# EAGLE board PropGame_DevBoard_schema (EAGLE 6.3)
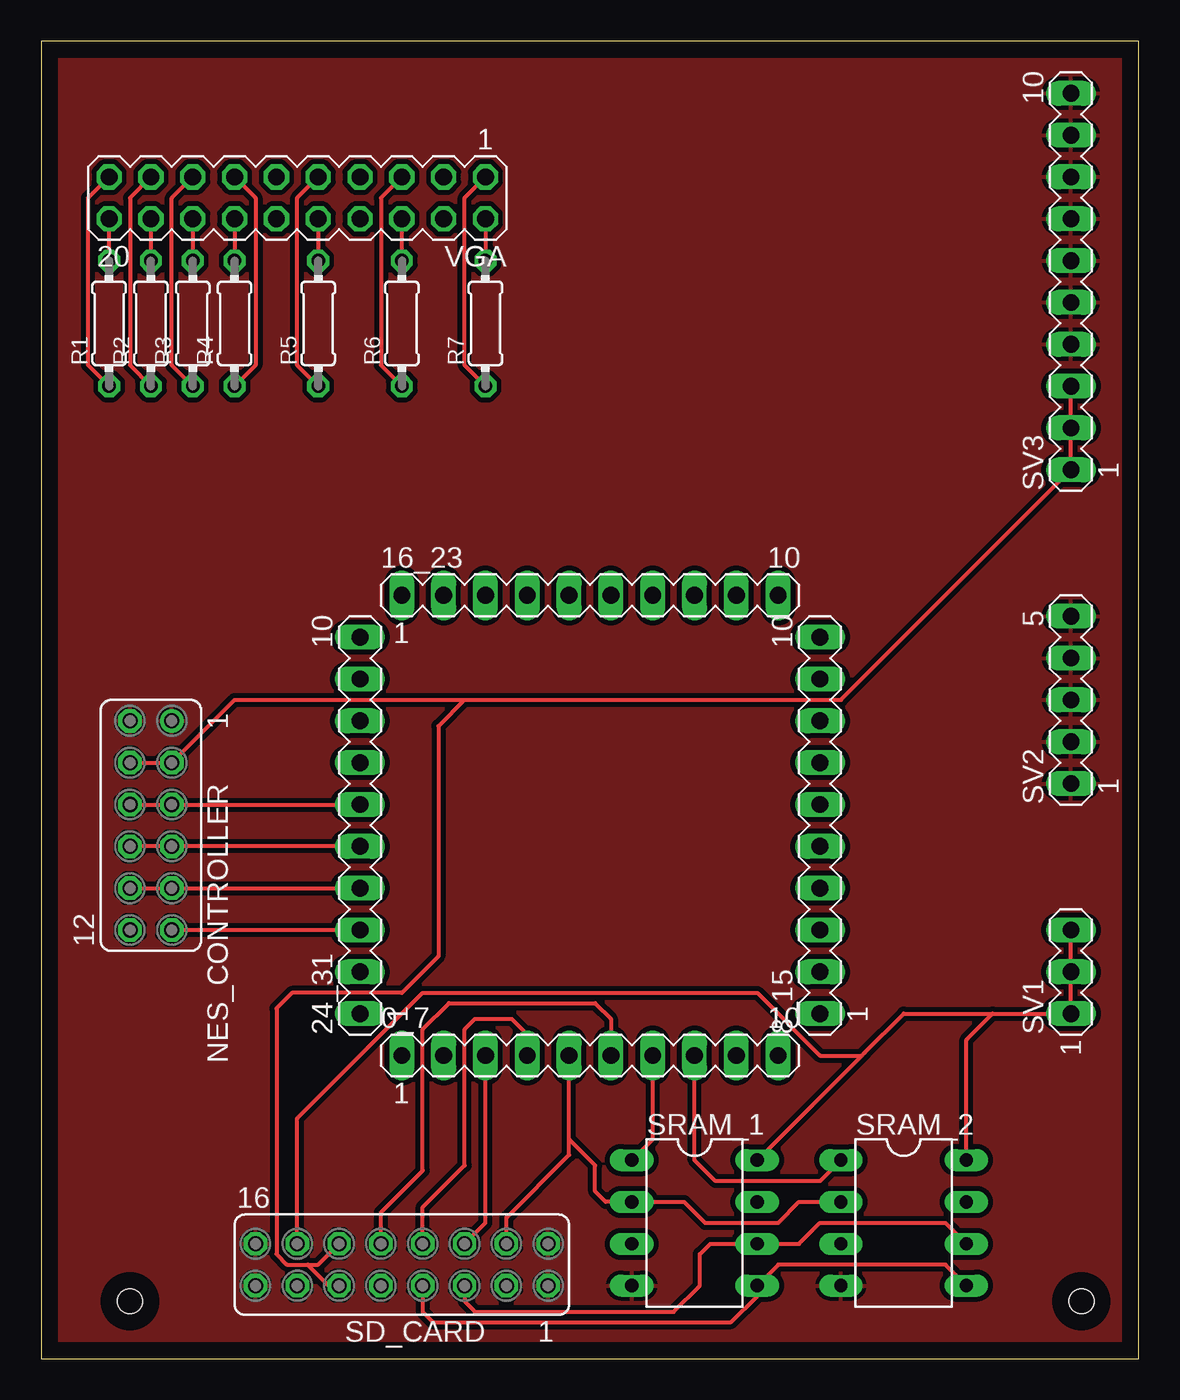
[diagram p0: board, top side]
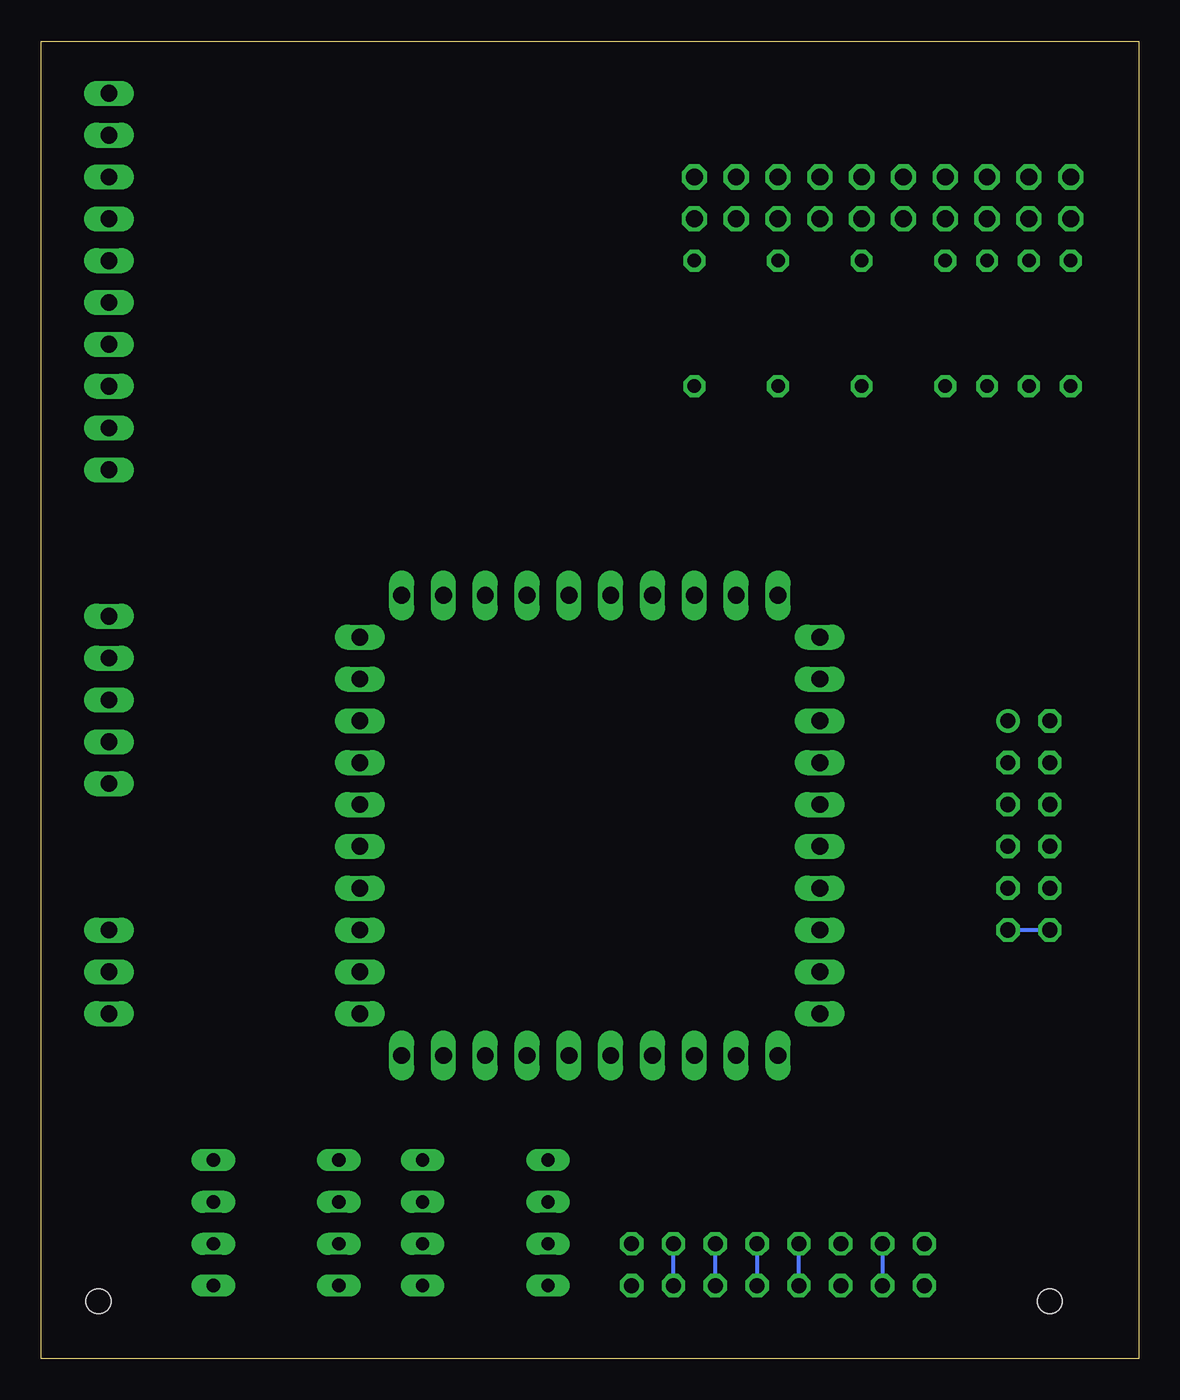
[diagram p1: board, bottom side, seen from below]

Size 66.66 x 80 mm. Coordinates in mm from the lower left corner, seen from the top.
Outline: 0,0 66.66,0 66.66,80 0,80 0,0
Copper layers (1*16): Top 0.035mm / dielectric 1.5mm / Bottom 0.035mm
Design rules "default *": minimum track width 10mil, minimum drill 24mil, track to track 12mil, track to pad 12mil, pad to pad 12mil, via to via 12mil, smd to smd 12mil, copper to edge 40mil, drill to drill 8mil, minimum pad ring 10mil, minimum via ring 8mil, stop-mask expansion 4mil, vias tented up to drill 0mil, thermal gap 10mil
Holes 1.5 mm at 63.18,3.49 5.4,3.49

## Footprints (pad centres in the part's own frame; a part is rotated, then mirrored left to right if it is on the bottom)
MA10-1 = drill 1.016 long: 1 -11.43,0; 2 -8.89,0; 3 -6.35,0; 4 -3.81,0; 5 -1.27,0; 6 1.27,0; 7 3.81,0; 8 6.35,0; 9 8.89,0; 10 11.43,0
FE06-2 = drill 0.914: 1 -6.35,1.27 | drill 0.914 octagon: 2 -6.35,-1.27; 3 -3.81,1.27; 4 -3.81,-1.27; 5 -1.27,1.27; 6 -1.27,-1.27; 7 1.27,1.27; 8 1.27,-1.27; 9 3.81,1.27; 10 3.81,-1.27; 11 6.35,1.27; 12 6.35,-1.27
0204/7 = drill 0.813 octagon: 1 -3.81,0; 2 3.81,0
FE08-2 = drill 0.914 octagon: 1 -8.89,1.27; 2 -8.89,-1.27; 3 -6.35,1.27; 4 -6.35,-1.27; 5 -3.81,1.27; 6 -3.81,-1.27; 7 -1.27,1.27; 8 -1.27,-1.27; 9 1.27,1.27; 10 1.27,-1.27; 11 3.81,1.27; 12 3.81,-1.27; 13 6.35,1.27; 14 6.35,-1.27; 15 8.89,1.27; 16 8.89,-1.27
DIL08 = drill 0.813 long: 1 -3.81,-3.81; 2 -1.27,-3.81; 3 1.27,-3.81; 4 3.81,-3.81; 5 3.81,3.81; 6 1.27,3.81; 7 -1.27,3.81; 8 -3.81,3.81
MA03-1 = drill 1.016 long: 1 -2.54,0; 2 0,0; 3 2.54,0
MA05-1 = drill 1.016 long: 1 -5.08,0; 2 -2.54,0; 3 0,0; 4 2.54,0; 5 5.08,0
MA10-2 = drill 1.016 octagon: 1 -11.43,-1.27; 2 -11.43,1.27; 3 -8.89,-1.27; 4 -8.89,1.27; 5 -6.35,-1.27; 6 -6.35,1.27; 7 -3.81,-1.27; 8 -3.81,1.27; 9 -1.27,-1.27; 10 -1.27,1.27; 11 1.27,-1.27; 12 1.27,1.27; 13 3.81,-1.27; 14 3.81,1.27; 15 6.35,-1.27; 16 6.35,1.27; 17 8.89,-1.27; 18 8.89,1.27; 19 11.43,-1.27; 20 11.43,1.27

## Placement (x,y rotation side)
0_7  [MA10-1]  33.34,18.41 0 top
8_15  [MA10-1]  47.31,32.38 90 top
16_23  [MA10-1]  33.34,46.35 0 top
24_31  [MA10-1]  19.37,32.38 90 top
NES_CONTROLLER  [FE06-2]  6.67,32.38 270 top
R1  [0204/7]  4.13,62.87 90 top
R2  [0204/7]  6.67,62.87 90 top
R3  [0204/7]  9.21,62.87 90 top
R4  [0204/7]  11.75,62.87 90 top
R5  [0204/7]  16.83,62.87 90 top
R6  [0204/7]  21.91,62.87 90 top
R7  [0204/7]  26.99,62.87 90 top
SD_CARD  [FE08-2]  21.91,5.71 180 top
SRAM_1  [DIL08]  39.69,8.26 270 top
SRAM_2  [DIL08]  52.39,8.26 270 top
SV1  [MA03-1]  62.55,23.5 90 top
SV2  [MA05-1]  62.55,40.01 90 top
SV3  [MA10-1]  62.55,65.41 90 top
VGA  [MA10-2]  15.56,70.48 180 top

## Library data of the parts
0_7 8_15 16_23 24_31 SV1-SV3 VGA = con-lstb; OC_FARNELL: unknown; OC_NEWARK: unknown
NES_CONTROLLER SD_CARD = con-lsta; OC_FARNELL: unknown; OC_NEWARK: unknown
R1-R7 = resistor
SRAM_1 SRAM_2 = ic-package

## Nets
3V3: SD_CARD.13 SD_CARD.14 SRAM_1.8 SRAM_2.8 SV1.1 SV1.2 SV1.3
5V: NES_CONTROLLER.3 NES_CONTROLLER.4 SD_CARD.11 SD_CARD.12 SV3.1 SV3.2 SV3.3
CLK: 24_31.3 NES_CONTROLLER.11 NES_CONTROLLER.12
CS_1: 0_7.6 SD_CARD.9 SD_CARD.10
CS_2: 0_7.7 SRAM_1.1
CS_3: 0_7.8 SRAM_2.1
DATA1: 24_31.5 NES_CONTROLLER.7 NES_CONTROLLER.8
DATA2: 24_31.6 NES_CONTROLLER.5 NES_CONTROLLER.6
GND: NES_CONTROLLER.1 NES_CONTROLLER.2 SD_CARD.1 SD_CARD.2 SD_CARD.15 SD_CARD.16 SRAM_1.4 SRAM_2.4 SV2.1 SV2.2 SV2.3 SV2.4 SV2.5 SV3.4 SV3.5 SV3.6 SV3.7 SV3.8 SV3.9 SV3.10
LATCH: 24_31.4 NES_CONTROLLER.9 NES_CONTROLLER.10
MISO: 0_7.5 SD_CARD.3 SD_CARD.4 SRAM_1.2 SRAM_2.2
MOSI: 0_7.4 SD_CARD.7 SD_CARD.8 SRAM_1.5 SRAM_2.5
N$1: R1.2 VGA.20
N$2: R2.2 VGA.18
N$3: R3.2 VGA.16
N$4: R4.2 VGA.14
N$5: R5.2 VGA.10
N$6: R6.2 VGA.6
N$7: R7.2 VGA.2
N$15: SRAM_1.7
N$19: SRAM_2.3
N$21: SRAM_2.7
N$26: SRAM_1.3
SCK: 0_7.3 SD_CARD.5 SD_CARD.6 SRAM_1.6 SRAM_2.6
W_1: R1.1 VGA.19
W_2: R2.1 VGA.17
W_3: R3.1 VGA.15
W_4: R4.1 VGA.13
W_5: R5.1 VGA.9
W_6: R6.1 VGA.5
W_7: R7.1 VGA.1

## Tracks (layer width: path | path; a pad name or v marks a point on that pad's centre or on a via)
3V3
  Top 0.254: SRAM_2.8 56.2,19.37 57.79,20.95 | 57.79,20.95 SV1.1 SV1.2 SV1.3 | SRAM_1.8 49.85,18.41 | 57.79,20.95 52.39,20.95 50.01,18.57 49.85,18.41 | SD_CARD.14 15.56,14.61 23.18,22.23 43.5,22.23 47.31,18.41 49.85,18.41
  Bottom 0.254: SD_CARD.14 SD_CARD.13
5V
  Top 0.254: NES_CONTROLLER.4 NES_CONTROLLER.3 11.75,40.01 25.72,40.01 | 25.72,40.01 48.58,40.01 SV3.1 SV3.2 SV3.3 | 25.72,40.01 24.13,38.42 24.13,24.45 21.91,22.23 15.24,22.23 14.29,21.27 14.29,6.35 14.92,5.71 16.19,5.71 | 16.19,5.71 16.83,5.71 SD_CARD.12 | 16.19,5.71 17.46,4.45 SD_CARD.11
CLK
  Top 0.254: 24_31.3 NES_CONTROLLER.11
  Bottom 0.254: NES_CONTROLLER.12 NES_CONTROLLER.11
CS_1
  Top 0.254: SD_CARD.10 20.64,8.89 23.18,11.43 23.18,20 24.76,21.59 33.66,21.59 34.61,20.64 0_7.6
  Bottom 0.254: SD_CARD.9 SD_CARD.10
CS_2
  Top 0.254: SRAM_1.1 37.15,13.34 0_7.7
CS_3
  Top 0.254: SRAM_2.1 47.31,10.79 40.96,10.79 39.69,12.06 0_7.8
DATA1
  Top 0.254: 24_31.5 NES_CONTROLLER.7 NES_CONTROLLER.8
DATA2
  Top 0.254: NES_CONTROLLER.6 NES_CONTROLLER.5 24_31.6
GND
  pour Top: 0,80.01 66.68,80.01 66.68,5.4 66.68,0 0,0 0,10.79
LATCH
  Top 0.254: NES_CONTROLLER.10 NES_CONTROLLER.9 24_31.4
MISO
  Top 0.254: SD_CARD.4 28.26,8.57 32.07,12.38 32.07,13.34 | 32.07,13.34 0_7.5 | 32.07,13.34 33.66,11.75 33.66,10.16 34.29,9.53 SRAM_1.2 39.05,9.53 40.32,8.26 44.77,8.26 46.04,9.53 SRAM_2.2
  Bottom 0.254: SD_CARD.3 SD_CARD.4
MOSI
  Top 0.254: SD_CARD.8 23.18,9.21 25.72,11.75 25.72,20 26.35,20.64 28.58,20.64 29.53,19.68 0_7.4 | SD_CARD.7 23.18,2.86 23.81,2.22 41.91,2.22 43.5,3.81 SRAM_1.5 44.77,5.71 54.93,5.71 SRAM_2.5
  Bottom 0.254: SD_CARD.8 SD_CARD.7
N$1
  Top 0.254: R1.2 VGA.20
N$2
  Top 0.254: VGA.18 R2.2
N$3
  Top 0.254: VGA.16 R3.2
N$4
  Top 0.254: VGA.14 R4.2
N$5
  Top 0.254: VGA.10 R5.2
N$6
  Top 0.254: R6.2 VGA.6
N$7
  Top 0.254: VGA.2 R7.2
SCK
  Top 0.254: 0_7.3 26.99,8.26 SD_CARD.6 | SD_CARD.5 25.72,3.49 26.35,2.86 38.42,2.86 40.01,4.45 40.01,6.35 40.64,6.99 SRAM_1.6 46.04,6.99 47.31,8.26 54.93,8.26 SRAM_2.6
  Bottom 0.254: SD_CARD.5 SD_CARD.6
W_1
  Top 0.254: R1.1 2.86,60.33 2.86,70.48 VGA.19
W_2
  Top 0.254: VGA.17 5.4,70.48 5.4,60.33 R2.1
W_3
  Top 0.254: R3.1 7.94,60.33 7.94,70.48 VGA.15
W_4
  Top 0.254: VGA.13 13.02,70.48 13.02,60.33 R4.1
W_5
  Top 0.254: R5.1 15.56,60.33 15.56,70.48 VGA.9
W_6
  Top 0.254: VGA.5 20.64,70.48 20.64,60.33 R6.1
W_7
  Top 0.254: R7.1 25.72,60.33 25.72,70.48 VGA.1